# Altium PCB MB784.PCBDOC (part 1 of 4)
Units mil, origin at the board's own origin, x right, y up, seen from the top; angles counter-clockwise.
Board outline 4505 x 6805 mil, 4 copper layers (TopLayer, GND, S1, BottomLayer); 363 components, 323 nets, 1564 pads, 534 vias.
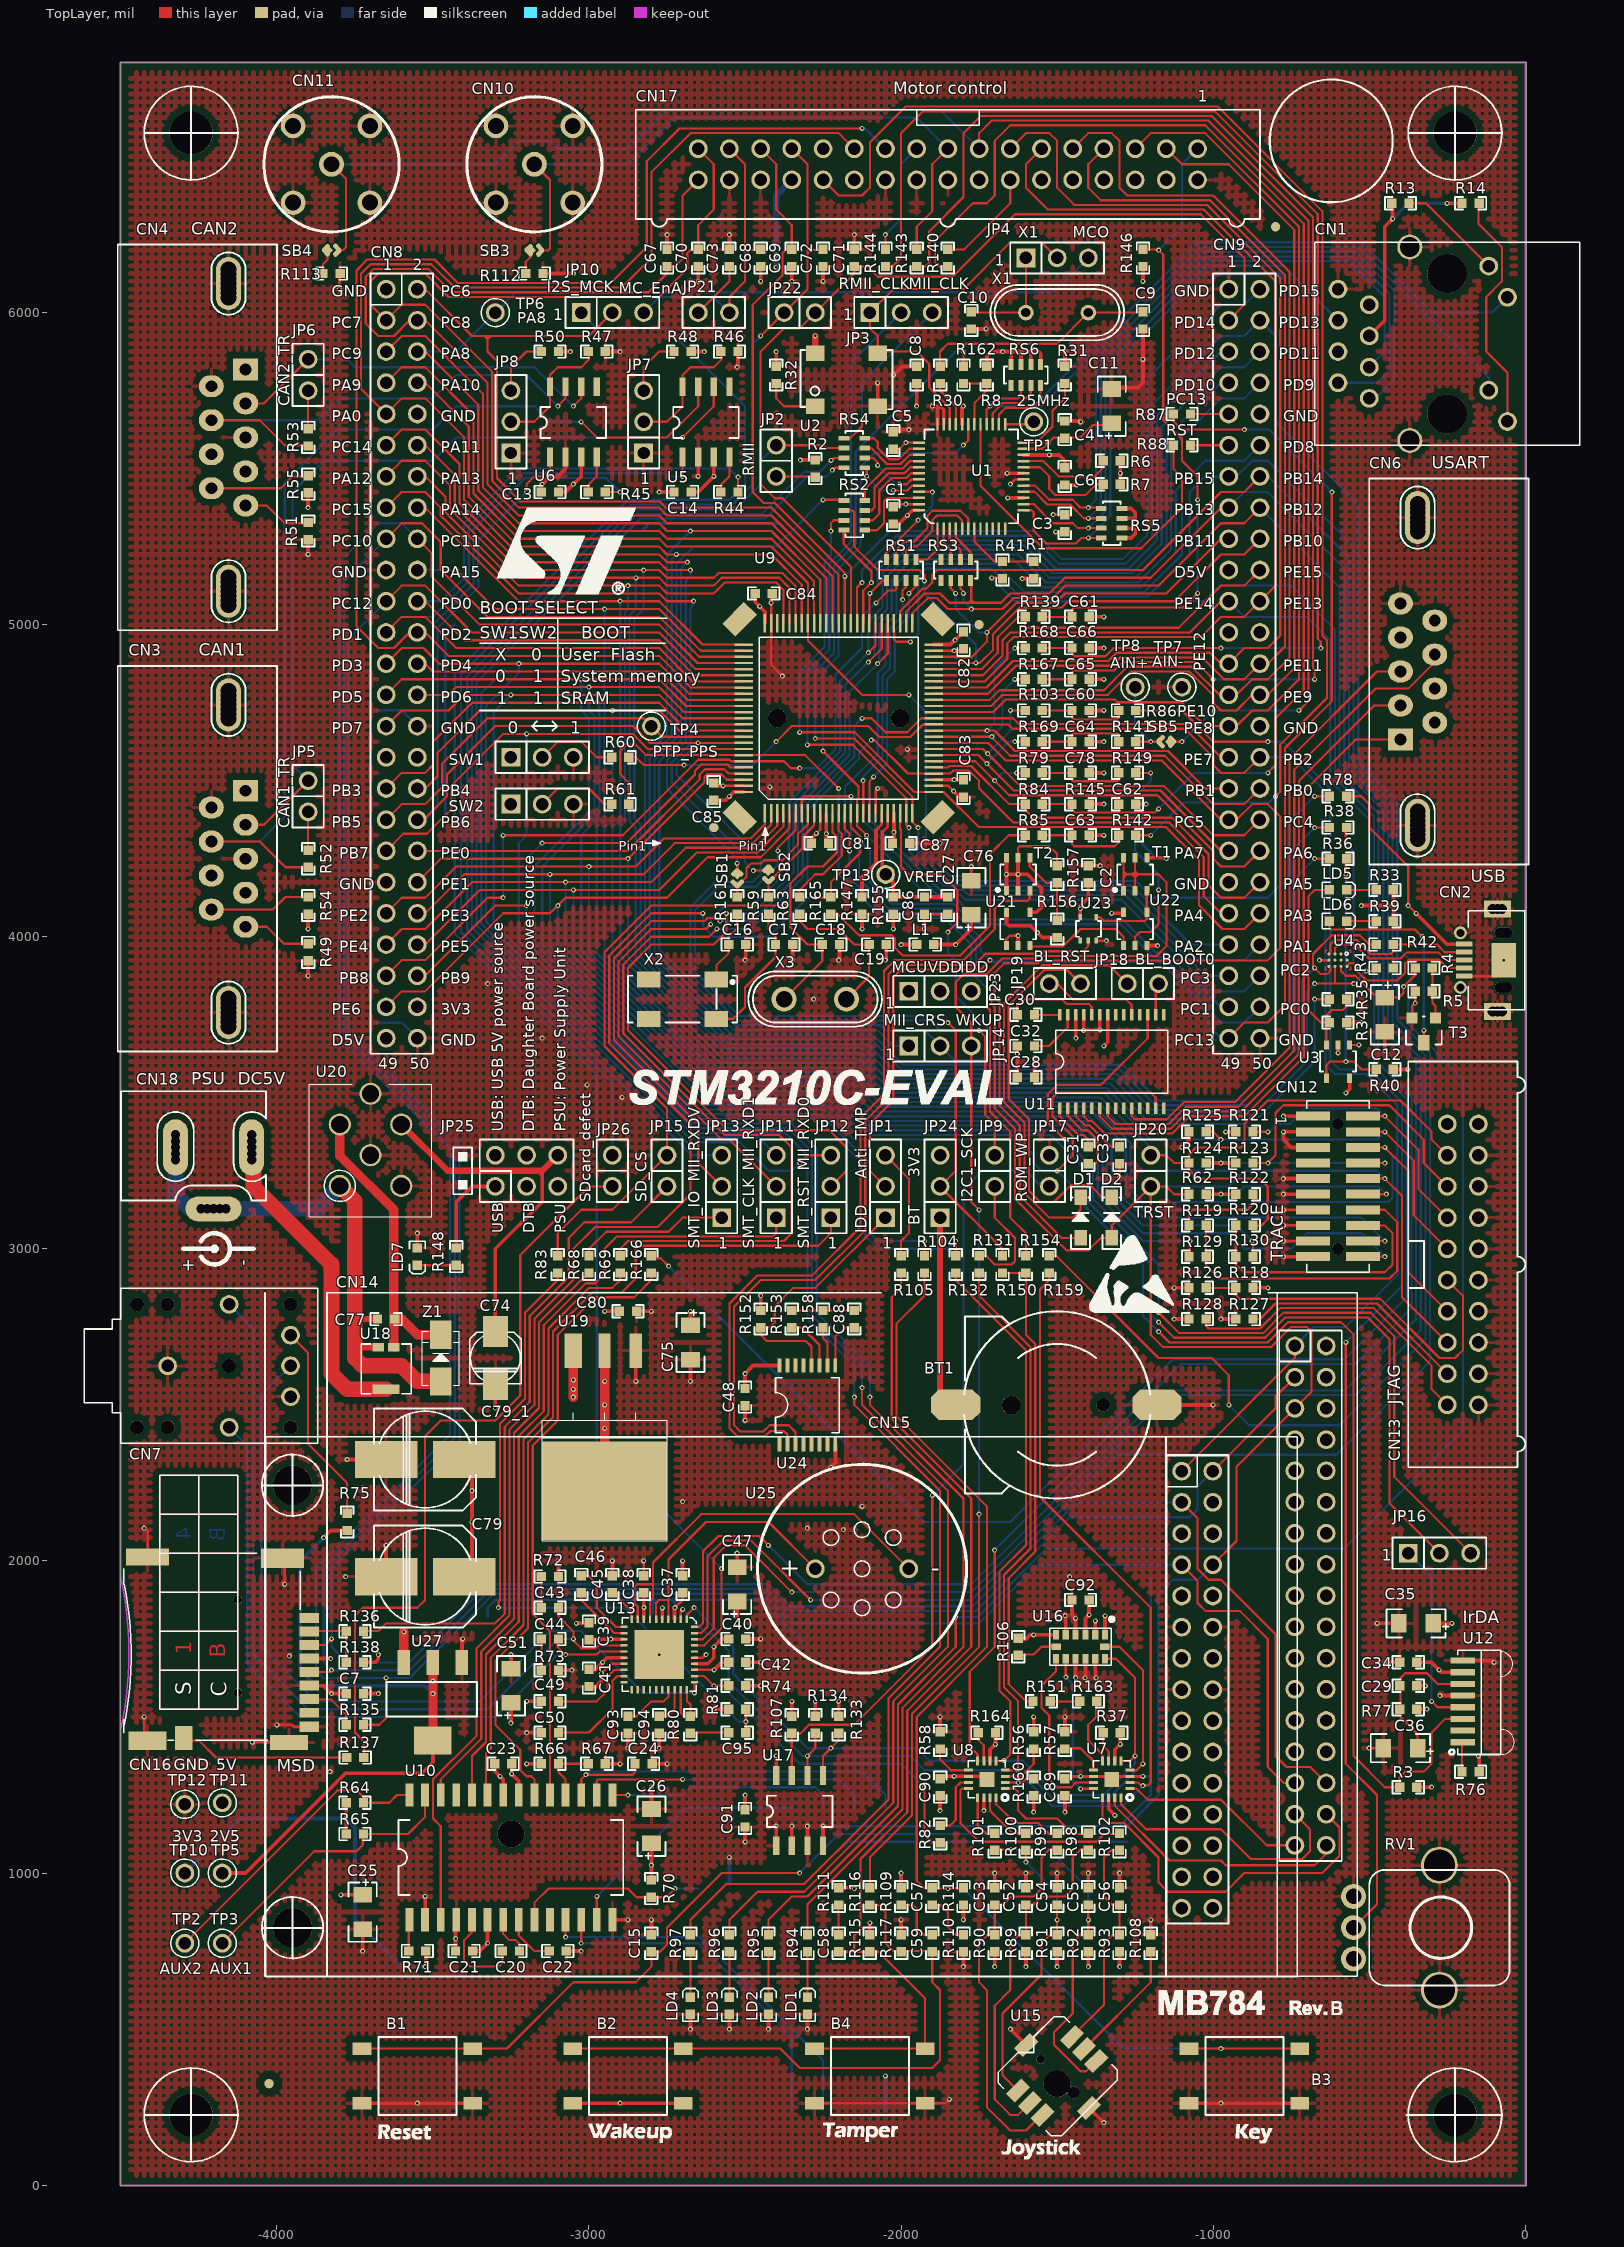
[diagram p0: TopLayer view]
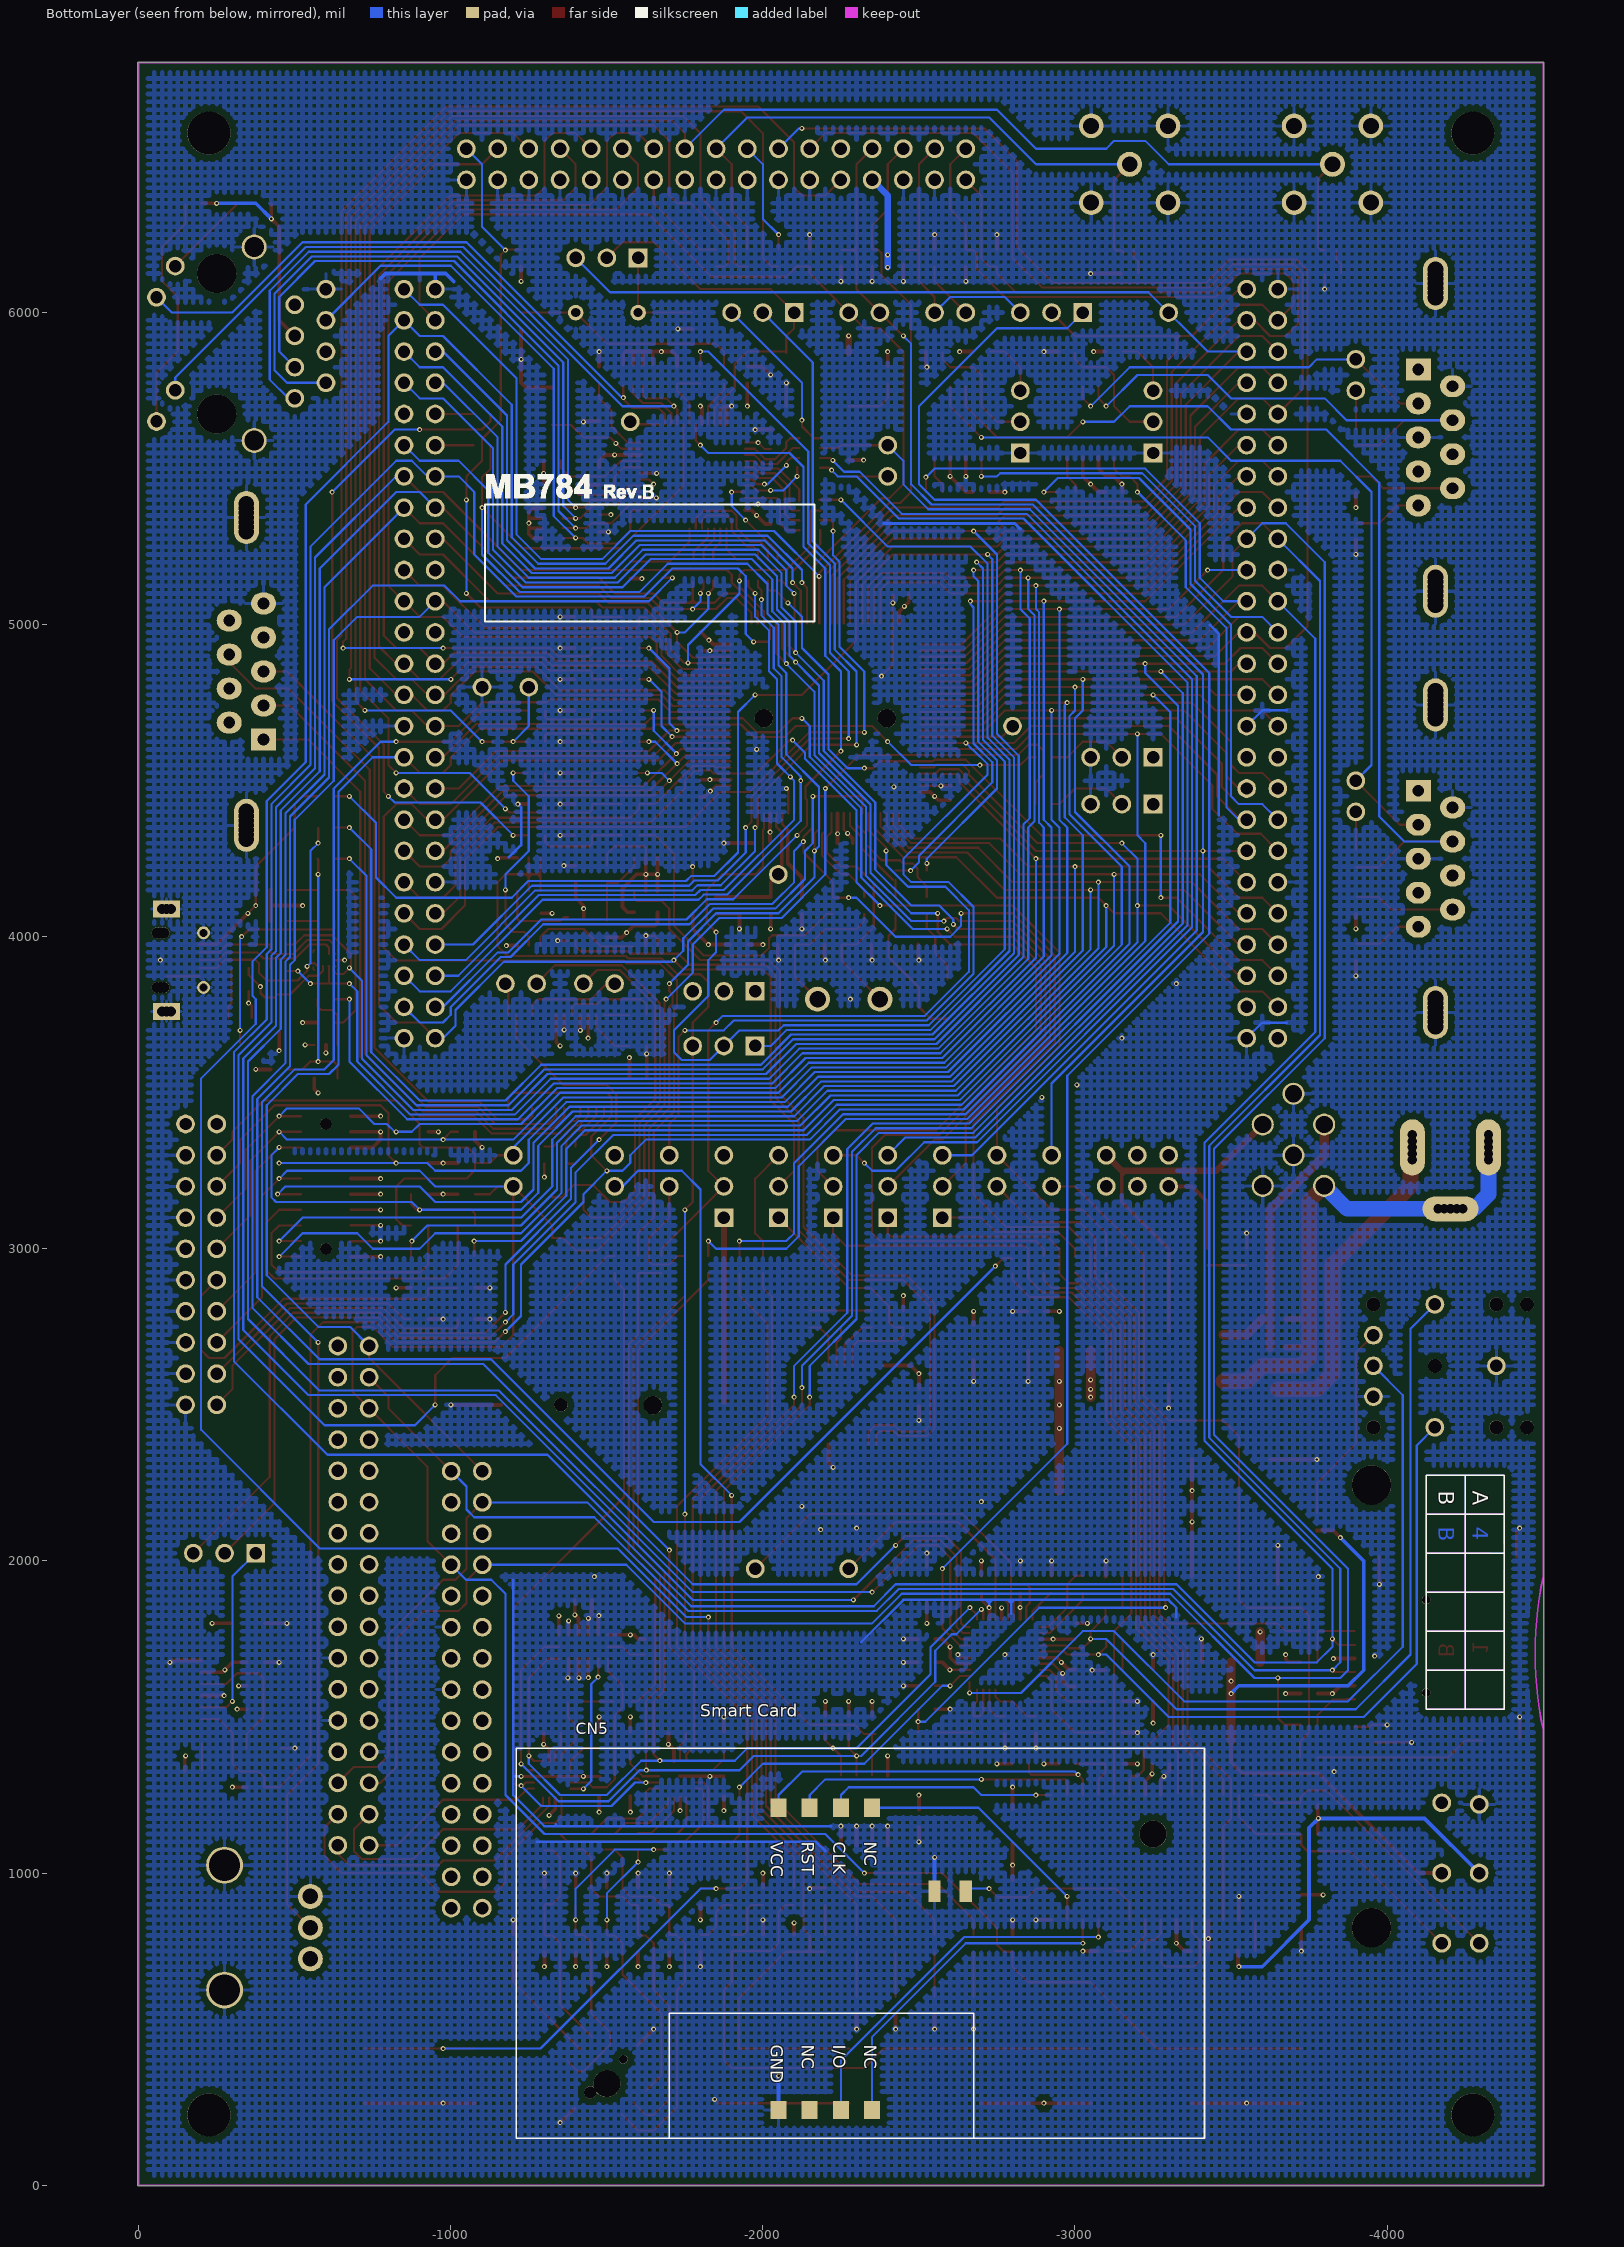
[diagram p1: BottomLayer view, seen from below]
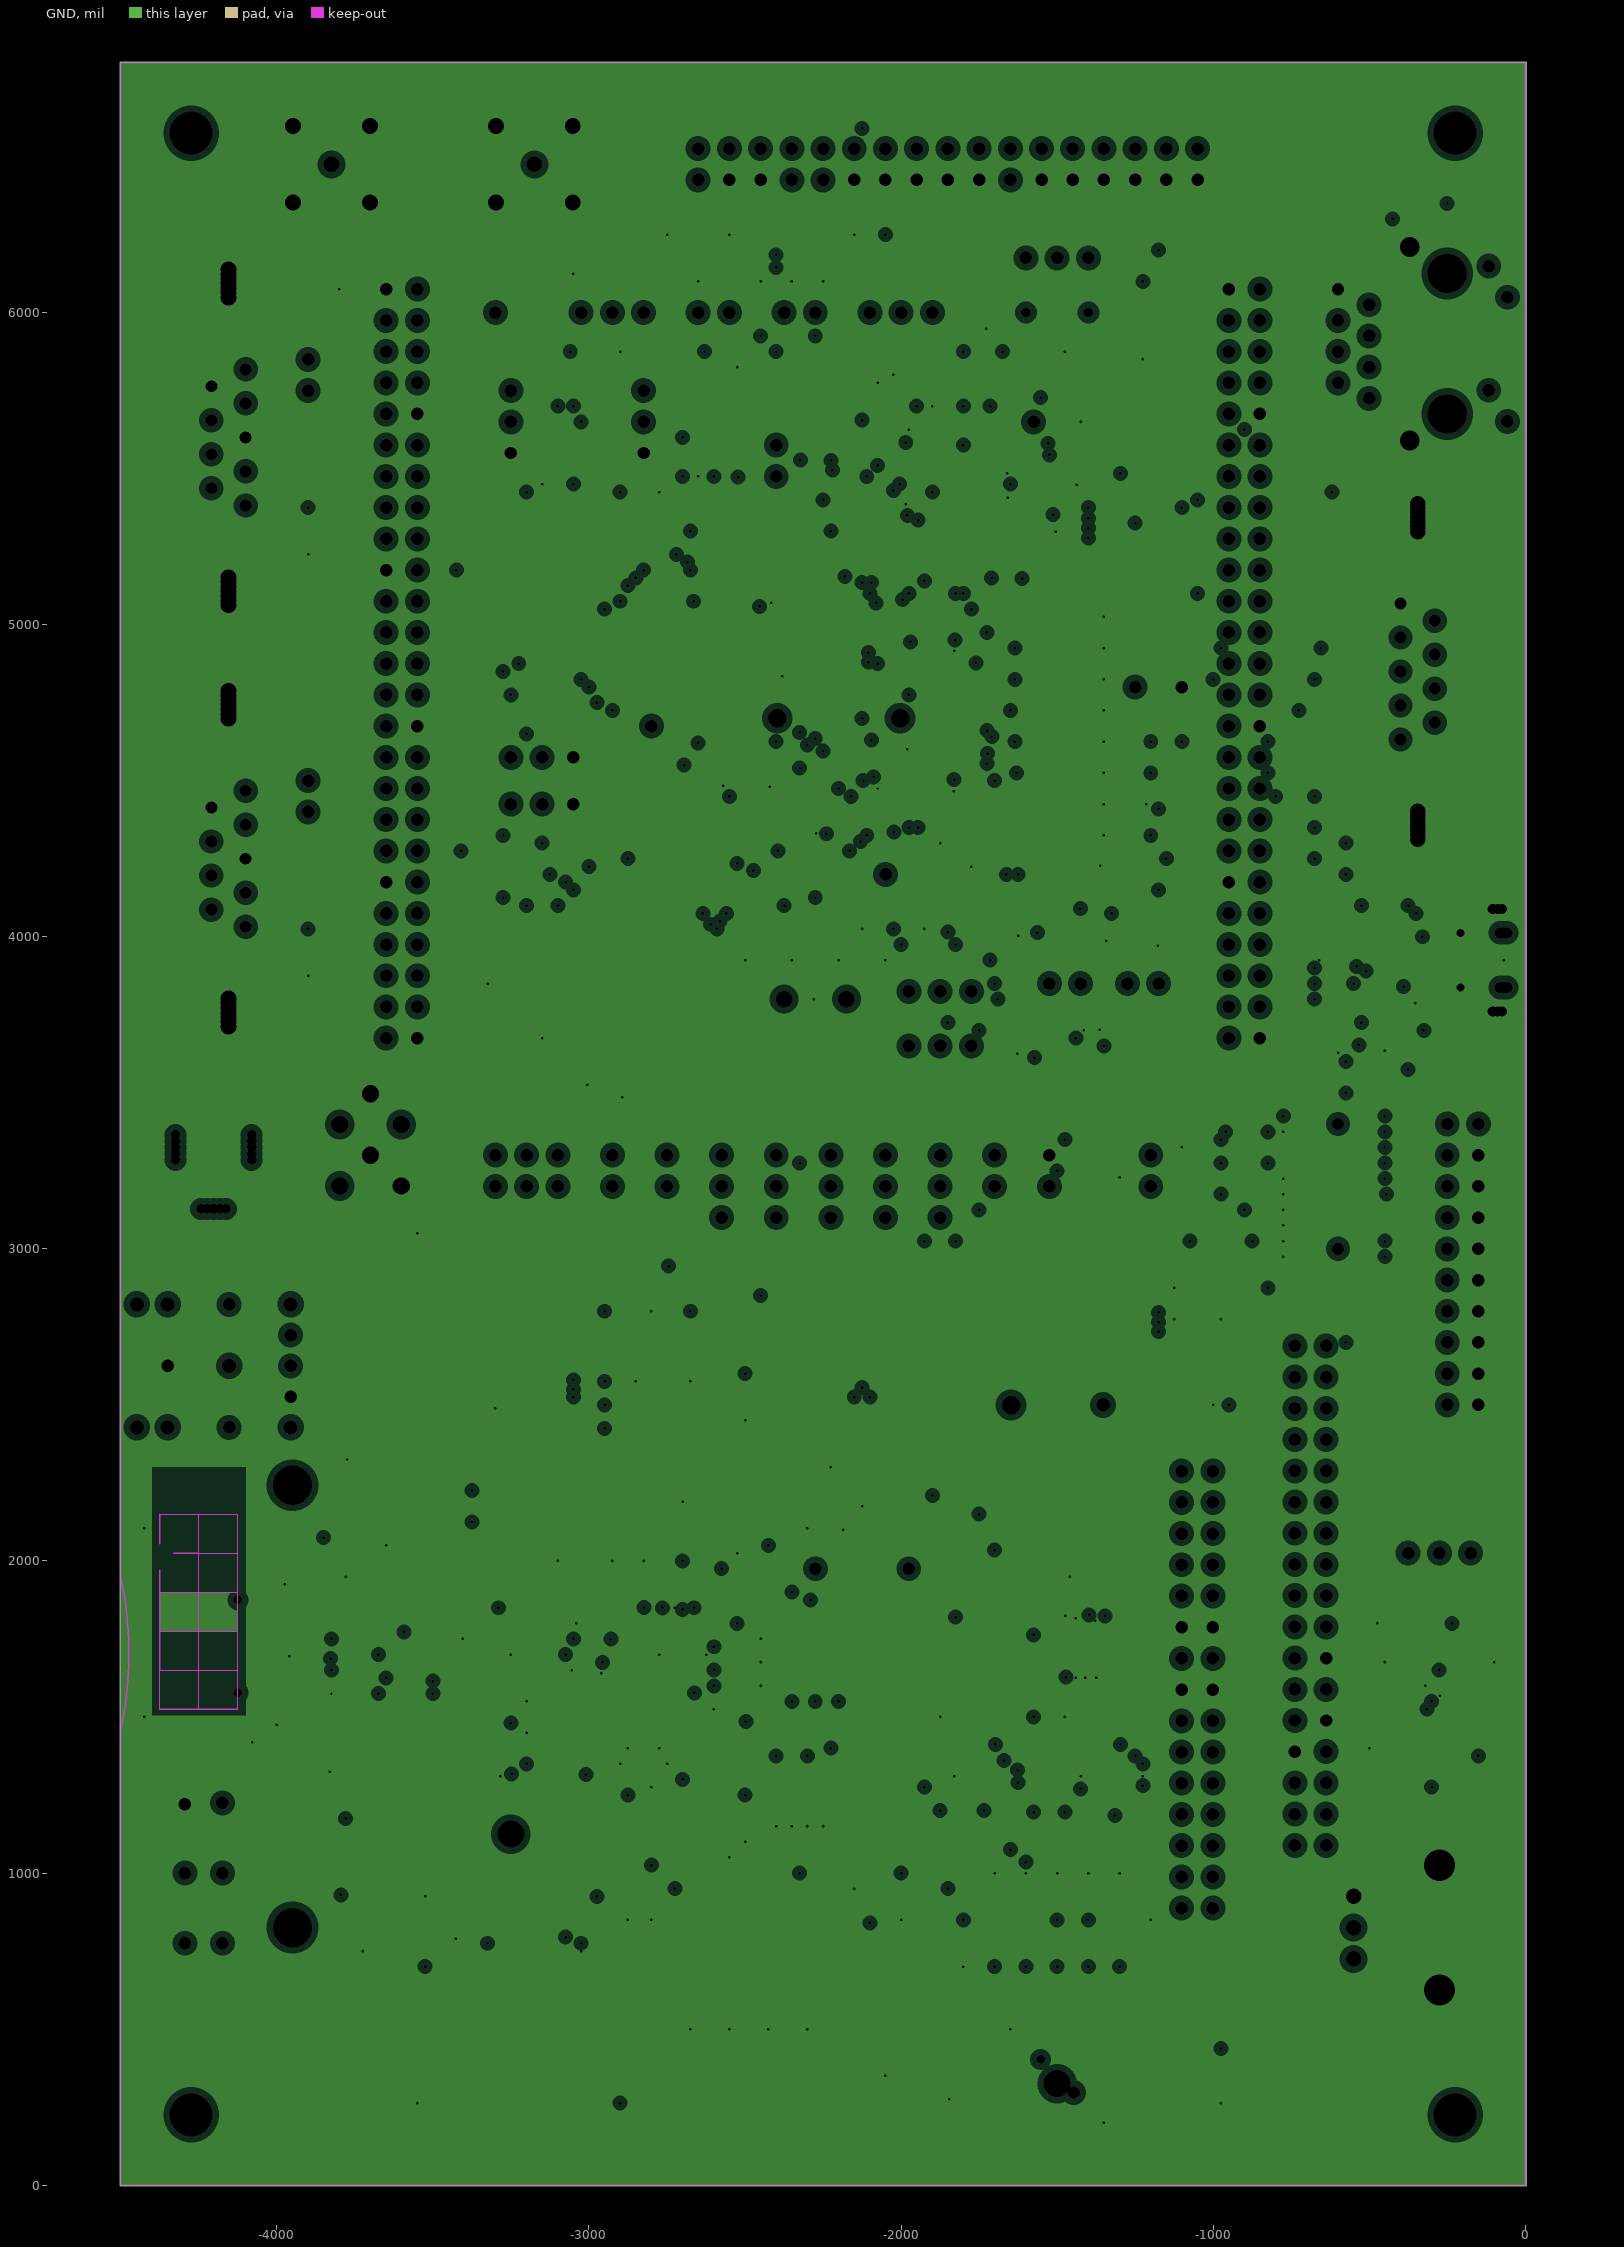
[diagram p2: GND, clearances drawn from the general rule]
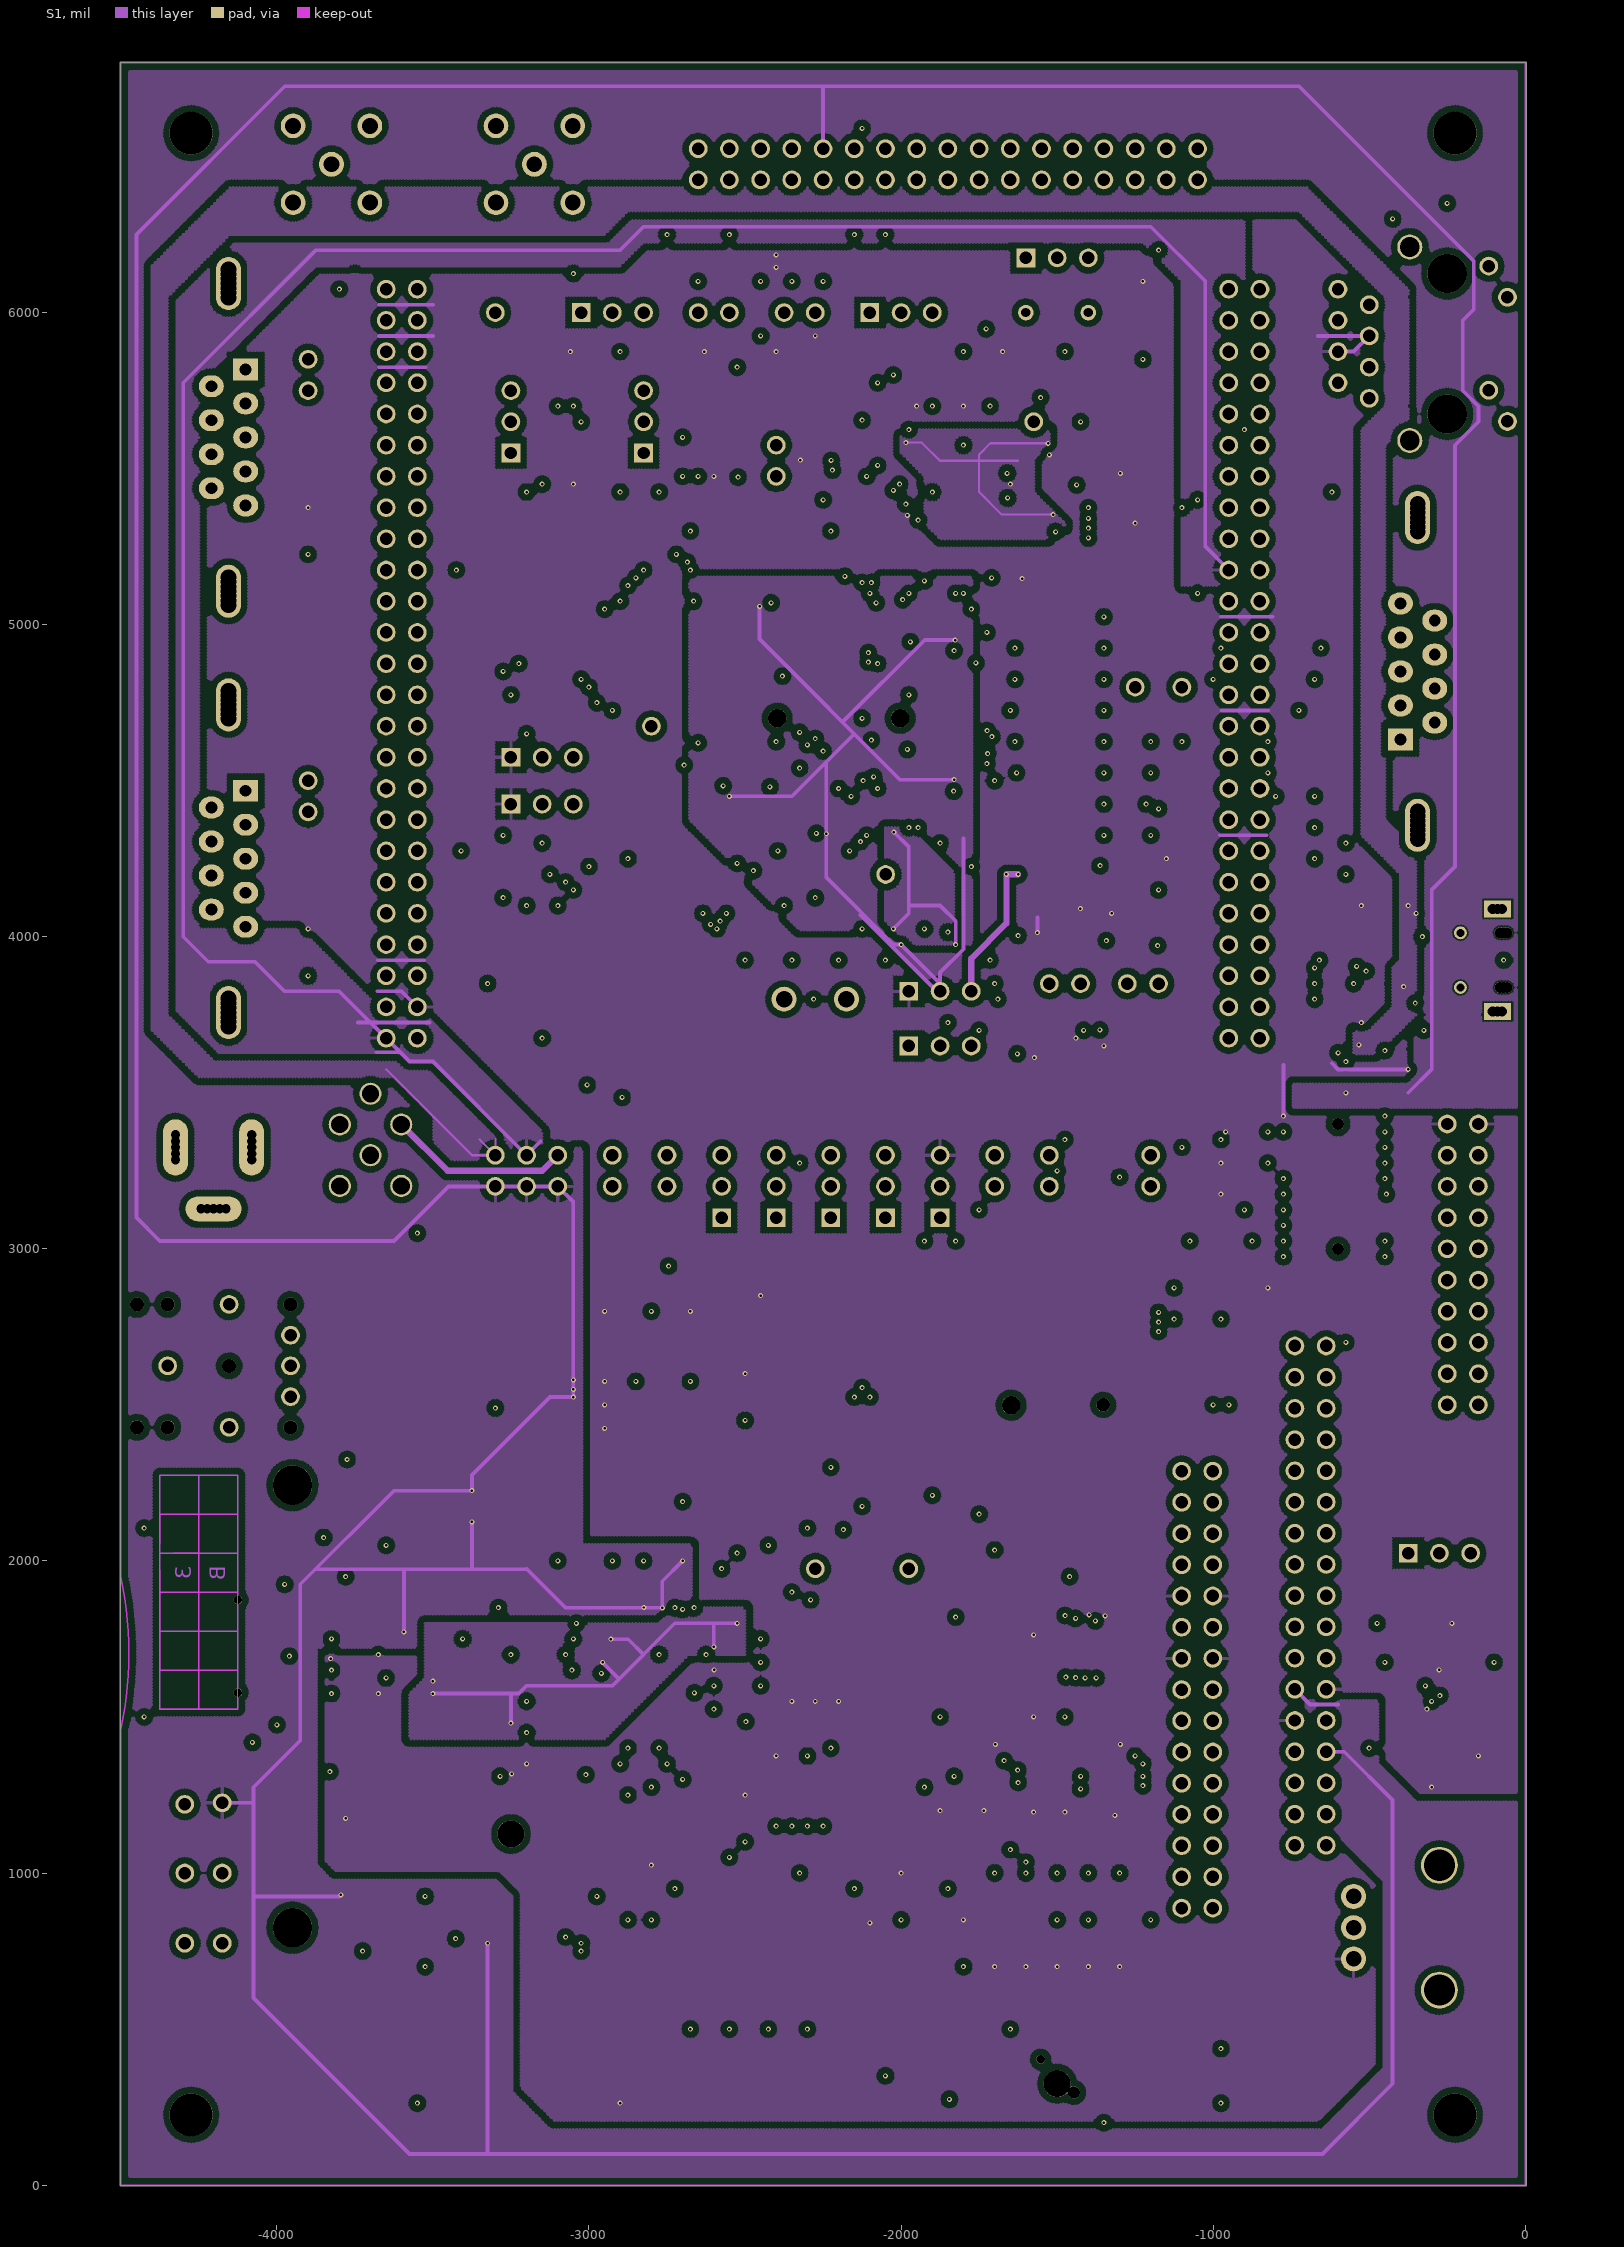
[diagram p3: S1]

## Layer stack, top to bottom
TopLayer: signal copper 1.4
Dielectric: core 12.6, FR-4, Dk 4.8
GND: plane copper 1.4, net GND
Dielectric: prepreg 12.6, FR-4, Dk 4.8
S1: signal copper 1.4
Dielectric: core 12.6, FR-4, Dk 4.8
BottomLayer: signal copper 1.4

## Board outline
-4502.5,-2.5 2.5,-2.5 2.5,6802.5 -4502.5,6802.5

## Design rules (kind name [scope] priority, off if disabled: settings)
Clearance Clearance_4 [InComponent('CN2')] p1: gap=5
Clearance Clearance_2 [InComponent('U4')] p2: gap=4
Clearance Clearance_3 [HasFootprint('JP2_SMD')] p3: gap=5
Clearance Clearance_1 [(InPoly)] p4: gap=20
Clearance [All] p5: gap=8
ComponentClearance [All] p1 off: gap=10 collisioncheckmode=0
PlaneClearance [All] p1: clearance=20
PlaneConnect [All] p1: planeconnectstyle=Relief reliefexpansion=20 reliefentries=4 reliefconductorwidth=10 reliefairgap=10
PolygonConnect [All] p1: connectstyle=Relief reliefconductorwidth=10 reliefentries=4 polygonreliefangle="90 Angle"
RoutingLayers [All] p1: top layer=Horizontal mid layer 1="Not Used" bottom layer=Vertical
RoutingVias [All] p1: holewidth=8 width=16 viastyle="Through Hole" minholewidth=8 minwidth=16 maxholewidth=28 maxwidth=50
SolderMaskExpansion [All] p1: expansion=4
TestPointUsage [All] p1: valid=0 allowmultiple=FALSE
Testpoint [All] p1: side=15 testpointundercomponent=TRUE minsize=40 maxsize=100 preferedsize=60 minholesize=20 maxholesize=40 preferedholesize=32 testpointgrid=1 style=1023 order=1234567890
Width Width_9 [InNet('VDDA')] p1: maxlimit=300 minlimit=8 preferedwidth=12
Width Width_10 [InNet('VREF+')] p2: maxlimit=300 minlimit=8 preferedwidth=12
Width Width_7 [InNet('GND')] p3: maxlimit=300 minlimit=8 preferedwidth=8
Width Width_6 [InNet('E5V')] p4: maxlimit=300 minlimit=8 preferedwidth=12
Width Width_1 [InNet('+2V5')] p5: maxlimit=300 minlimit=8 preferedwidth=12
Width Width_2 [InNet('+3V3')] p6: maxlimit=300 minlimit=8 preferedwidth=12
Width Width_3 [InNet('+5V')] p7: maxlimit=300 minlimit=8 preferedwidth=12
Width Width_11 [InNet('VREF-')] p8: maxlimit=300 minlimit=8 preferedwidth=12
Width Width_8 [InNet('VDD_MCU')] p9: maxlimit=300 minlimit=5 preferedwidth=12
Width Width_4 [InNet('D5V')] p10: maxlimit=300 minlimit=5 preferedwidth=12
Width Width_5 [InNet('DVDD')] p11: maxlimit=300 minlimit=5 preferedwidth=12
Width [All] p12: maxlimit=300 minlimit=5 preferedwidth=7
14 further rules are at their usual default settings.

## Classes and differential pairs
component class MCU: B1 C15 C16 C17 C18 C19 D1 D2 JP1 JP9 JP10 JP11 JP12 JP13 JP14 JP15 R59 R60 R61 R62 R63 R78 R161 R165 SW1 SW2 TP4 X2 X3
component class IOPeripherals: B2 B3 B4 C52 C53 C54 C55 C56 C57 C58 C59 C60 C91 C92 CN10 CN11 JP17 LD1 LD2 LD3 LD4 R89 R90 R91 R92 R93 R94 R95 R96 R97 R98 R99 R100 R101 R102 R103 R104 R105 R106 R107 R108 R109 R110 R111 R112 R113 R114 R115 R116 R117 RV1 SB3 SB4 U15 U16 U17
component class Power: BT1 C51 C74 C75 C76 C77 C78 C79 C80 C81 C82 C83 C84 C85 C86 C87 C88 CN18 JP23 JP24 JP25 L1 LD7 R79 R147 R148 R149 R150 R151 R152 R153 R154 R155 R156 R157 R158 R163 T1 T2 TP5 TP10 TP11 TP12 TP13 U9 U18 U19 U20 U21 U22 U23 U24 U27 Z1
component class Ethernet: C1 C2 C3 C4 C5 C6 C7 C8 C9 C10 C11 CN1 JP2 JP3 JP4 R1 R2 R3 R4 R5 R6 R7 R8 R9 R10 R11 R12 R13 R14 R15 R16 R17 R18 R19 R20 R21 R22 R23 R24 R25 R26 R27 R28 R29 R30 R31 R32 R41 R162 TP1 U1 U2 X1
component class USB_OTG_FS: C12 CN2 LD5 LD6 R33 R34 R35 R36 R38 R39 R40 R42 R43 U3 U4
component class CAN: C13 C14 CN3 CN4 JP5 JP6 JP7 JP8 R44 R45 R46 R47 R48 R49 R50 R51 R52 R53 R54 R55 U5 U6
component class SmartCard: C20 C21 C22 C23 C24 C25 C26 C27 CN5 R64 R65 R66 R67 R68 R69 R70 R71 R166 TP2 TP3 U10
component class USART&IrDA: C28 C29 C30 C31 C32 C33 C34 C35 C36 CN6 JP16 R76 R77 U11 U12
component class Audio: C37 C38 C39 C40 C41 C42 C43 C44 C45 C46 C47 C48 C49 C50 C93 C94 C95 CN7 R72 R73 R74 R75 R80 R81 R82 U13 U25
component class MotorControl: C61 C62 C63 C64 C65 C66 C67 C68 C69 C70 C71 C72 C73 CN17 JP21 JP22 R139 R140 R141 R142 R143 R144 R145 R146 R167 R168 R169
component class IO_Expandor: C89 C90 R37 R56 R57 R58 R159 R160 R164 U7 U8
component class ExtensionConnector: CN8 CN9 R87 R88 SB1 SB2
component class JTAG&Trace: CN12 CN13 JP20 R118 R119 R120 R121 R122 R123 R124 R125 R126 R127 R128 R129 R130
component class LCD: CN14 CN15
component class MicroSDCard: CN16 R135 R136 R137 R138
component class MB784: R131 R132 R133 R134
net class PA[0..15]: NetC62_2 PA0 PA1 PA2 PA3 PA4 PA6 PA7 PA8 PA9 PA10 PA11 PA12 PA13 PA14 PA15 PA[0..15]0 PA[0..15]1 PA[0..15]2 PA[0..15]3 PA[0..15]4 PA[0..15]5 PA[0..15]6 PA[0..15]7 PA[0..15]8 PA[0..15]9 PA[0..15]10 PA[0..15]11 PA[0..15]12 PA[0..15]13 PA[0..15]14 PA[0..15]15
net class PB[0..15]: PB0 PB1 PB2 PB3 PB4 PB5 PB6 PB7 PB8 PB9 PB10 PB11 PB12 PB13 PB14 PB15 PB[0..15]0 PB[0..15]1 PB[0..15]2 PB[0..15]3 PB[0..15]4 PB[0..15]5 PB[0..15]6 PB[0..15]7 PB[0..15]8 PB[0..15]9 PB[0..15]10 PB[0..15]11 PB[0..15]12 PB[0..15]13 PB[0..15]14 PB[0..15]15
net class PC[0..15]: PC0 PC1 PC2 PC3 PC4 PC5 PC6 PC7 PC8 PC9 PC10 PC11 PC12 PC13 PC14 PC15 PC[0..15]0 PC[0..15]1 PC[0..15]2 PC[0..15]3 PC[0..15]4 PC[0..15]5 PC[0..15]6 PC[0..15]7 PC[0..15]8 PC[0..15]9 PC[0..15]10 PC[0..15]11 PC[0..15]12 PC[0..15]13 PC[0..15]14 PC[0..15]15
net class PD[0..15]: NetJP10_3 PD0 PD1 PD3 PD4 PD5 PD6 PD7 PD8 PD9 PD10 PD11 PD12 PD13 PD15 PD[0..15]0 PD[0..15]1 PD[0..15]2 PD[0..15]3 PD[0..15]4 PD[0..15]5 PD[0..15]6 PD[0..15]7 PD[0..15]8 PD[0..15]9 PD[0..15]10 PD[0..15]11 PD[0..15]12 PD[0..15]13 PD[0..15]14 PD[0..15]15 PE0
net class PE[0..15]: PE0 PE1 PE2 PE3 PE4 PE5 PE6 PE7 PE8 PE9 PE10 PE11 PE12 PE13 PE14 PE15 PE[0..15]0 PE[0..15]1 PE[0..15]2 PE[0..15]3 PE[0..15]4 PE[0..15]5 PE[0..15]6 PE[0..15]7 PE[0..15]8 PE[0..15]9 PE[0..15]10 PE[0..15]11 PE[0..15]12 PE[0..15]13 PE[0..15]14 PE[0..15]15

## Components (designator, comment, footprint, x,y, rotation, side; value= is the part's Value field where it differs from the comment)
B1 "RESET" PB10 -3550,350 r0 top
B2 "WKUP" PB10 -2875,350 r0 top
B3 "USER" PB10 -900,350 r0 top
B4 "Tamper" PB10 -2100,350 r0 top
BT1 "CR1220 holder" LI1220_1 -1500,2500 r180 top
C1 "100nF" 0603C -2025,5350 r90 top
C2 "100nF" 0603C -1400,4200 r90 top
C3 "100nF" 0603C -1475,5325 r90 top
C4 "100nF" 0603C -1475,5625 r90 top
C5 "100nF" 0603C -2025,5590 r90 top
C6 "100nF" 0603C -1475,5475 r90 top
C7 "100nF" 0603C -3750,1575 r180 top
C8 "100nF" 0603C -1950,5800 r90 top
C9 "22pF" 0603R -1225,5975 r270 top
C10 "22pF" 0603R -1775,5975 r90 top
C11 "10uF" TAN-A -1325,5700 r270 top
C12 "4.7uF" TAN-A -450,3750 r90 top
C13 "100nF" 0603C -3125,5425 r180 top
C14 "100nF" 0603C -2700,5425 r180 top
C15 "100nF" 0603C -2800,775 r90 top
C16 "10pF" 0603C -2525,3975 r180 top
C17 "10pF" 0603C -2375,3975 r180 top
C18 "20pF" 0603C -2225,3975 r180 top
C19 "20pF" 0603C -2075,3975 r180 top
C20 "100nF" 0603C -3250,750 r0 top
C21 "100nF" 0603C -3400,750 r0 top
C22 "100nF" 0603C -3100,750 r180 top
C23 "100nF" 0603C -3275,1350 r0 top
C24 "100nF" 0603C -2825,1350 r0 top
C25 "10uF" TAN-A -3725,875 r90 top
C26 "10uF" TAN-A -2800,1150 r270 top
C27 "470nF" 0603C -1850,4100 r90 top
C28 "100nF" 0603C -1600,3550 r0 top
C29 "100nF" 0603C -375,1600 r180 top
C30 "100nF" 0603C -1600,3750 r180 top
C31 "100nF" 0603C -1400,3300 r90 top
C32 "100nF" 0603C -1600,3650 r0 top
C33 "100nF" 0603C -1300,3300 r90 top
C34 "100nF" 0603C -375,1675 r180 top
C35 "4.7uF" TAN-A -350,1800 r0 top
C36 "4.7uF" TAN-A -400,1400 r0 top
C37 "100nF" 0603C -2700,1925 r90 top
C38 "100nF" 0603C -2825,1925 r270 top
C39 "100nF" 0603C -3000,1775 r90 top
C40 "100nF" 0603C -2525,1750 r0 top
C41 "100nF" 0603C -3000,1625 r270 top
C42 "100nF" 0603C -2525,1675 r0 top
C43 "0.022uF" 0603C -3125,1850 r180 top
C44 "0.022uF" 0603C -3125,1750 r180 top
C45 "1uF" 0603C -2925,1925 r270 top
C46 "1uF" 0603C -3025,1925 r270 top
C47 "1uF" TAN-A -2525,1925 r270 top
C48 "100nF" 0603C -2500,2525 r90 top
C49 "1uF" 0603C -3125,1550 r180 top
C50 "1uF" 0603C -3125,1450 r180 top
C51 "10uF" TAN-A -3250,1600 r270 top
C52 "100nF" 0603C -1600,925 r90 top
C53 "100nF" 0603C -1700,925 r90 top
C54 "100nF" 0603C -1500,925 r90 top
C55 "100nF" 0603C -1400,925 r90 top
C56 "100nF" 0603C -1300,925 r90 top
C57 "100nF" 0603C -1900,925 r270 top
C58 "100nF" 0603C -2200,775 r90 top
C59 "[N/A]" 0603C -1900,775 r90 top
C60 "10nF" 0603C -1425,4725 r0 top
C61 "1nF" 0603C -1425,5025 r0 top
C62 "100nF" 0603C -1275,4425 r0 top
C63 "100nF" 0603C -1425,4325 r0 top
C64 "[N/A]" 0603C -1425,4625 r0 top
C65 "[N/A]" 0603C -1425,4825 r0 top
C66 "[N/A]" 0603C -1425,4925 r0 top
C67 "[N/A]" 0603C -2750,6175 r90 top
C68 "[N/A]" 0603C -2450,6175 r270 top
C69 "[N/A]" 0603C -2350,6175 r270 top
C70 "[N/A]" 0603C -2650,6175 r270 top
C71 "[N/A]" 0603C -2150,6175 r90 top
C72 "[N/A]" 0603C -2250,6175 r270 top
C73 "10nF" 0603C -2550,6175 r90 top
C74 "10uF" C160M -3300,2650 r90 top
C75 "10uF" TAN-A -2675,2700 r90 top
C76 "10uF" TAN-A -1775,4125 r270 top
C77 "100nF" 0603C -3650,2775 r0 top
C78 "0.47uF" 0603C -1425,4525 r180 top
C79 "220uF" C310M -3525,1950 r0 top
C79_1 "220uF" C310M -3525,2325 r0 top
C80 "100nF" 0603C -2875,2800 r180 top
C81 "10nF" 0603C -2260,4300 r0 top
C82 "10nF" 0603C -1800,4950 r90 top
C83 "10nF" 0603C -1800,4475 r90 top
C84 "10nF" 0603C -2440,5100 r180 top
C85 "10nF" 0603C -2600,4465 r270 top
C86 "10nF" 0603C -1925,4100 r90 top
C87 "10nF" 0603C -2000,4300 r180 top
C88 "1nF" 0603C -2150,2775 r270 top
C89 "100nF" 0603C -1475,1275 r270 top
C90 "100nF" 0603C -1875,1275 r90 top
C91 "100nF" 0603C -2500,1175 r270 top
C92 "100nF" 0603C -1425,1875 r180 top
C93 "150pF(COG)" 0603C -2875,1475 r270 top
C94 "150pF(COG)" 0603C -2775,1475 r270 top
C95 "1uF" 0603C -2525,1450 r180 top
CN1 "J0011D21B" J0011D21B -250,5675 r270 top
CN2 "475900001" USB-MICRO-AB -195,3925 r180 top
CN3 "DB9-male CAN connector" DB9/M -4100,4250 r90 top
CN4 "DB9-male CAN connector" DB9/M -4100,5600 r90 top
CN5 "C816" SAM(C816) -2375,725 r270 bottom
CN6 "DB9-male UART4" DB9/M -400,4850 r270 top
CN7 "ST-212-02V" ST-212-02V -4350,2625 r180 top
CN8 "Header 25X2" 2*25P -3650,6075 r0 top locked
CN9 "Header 25X2" 2*25P -950,6075 r0 top locked
CN10 "VB334" VB334 -3175,6475 r0 top
CN11 "VB334" VB334 -3825,6475 r0 top
CN12 "FTSH-110-01-L-DV" FTSH-110-01-L-DV -600,3200 r270 top
CN13 "JTAG" IDC20S -250,3400 r0 top locked
CN14 "3.2\" LCD_connector (MB785 with AM-240320D4TOQW-T00H(R))" AM240*320AA -3950,825 r0 top
CN15 "2.4\" LCD connector (MB542 with AM240320L8TNQW-00H)" AM240*320B -3950,825 r0 top
CN16 "PJS008-2000" MSD(PJS008) -4125,1875 r180 top
CN17 "MC_connector" IDC34S -1050,6525 r270 top locked
CN18 "DC-10B" DC10B -4325,3325 r0 top
D1 "1N4148" 1504D -1425,3100 r270 top
D2 "1N4148" 1504D -1325,3100 r270 top
JP1 "" SIP3 -2050,3100 r90 top
JP2 "" SIP2 -2400,5575 r270 top
JP3 "" SIP3 -2100,6000 r0 top
JP4 "" SIP3 -1600,6175 r0 top
JP5 "" SIP2 -3900,4400 r90 top
JP6 "" SIP2 -3900,5750 r90 top
JP7 "" SIP3 -2825,5550 r90 top
JP8 "" SIP3 -3250,5550 r90 top
JP9 "" SIP2 -1700,3300 r270 top
JP10 "" SIP3 -3025,6000 r0 top
JP11 "" SIP3 -2400,3100 r90 top
JP12 "" SIP3 -2225,3100 r90 top
JP13 "" SIP3 -2575,3100 r90 top
JP14 "" SIP3 -1975,3650 r0 top
JP15 "" SIP2 -2750,3300 r270 top
JP16 "" SIP3 -375,2025 r0 top
JP17 "" SIP2 -1525,3200 r90 top
JP18 "" SIP2 -1275,3850 r0 top
JP19 "" SIP2 -1425,3850 r180 top
JP20 "" SIP2 -1200,3300 r270 top
JP21 "" SIP2 -2550,6000 r180 top
JP22 "" SIP2 -2375,6000 r0 top
JP23 "" SIP3 -1975,3825 r0 top
JP24 "" SIP3 -1875,3100 r90 top
JP25 "" 2*3P -3300,3200 r90 top
JP26 "" SIP2 -2925,3200 r90 top
L1 "BEAD" 0603L -1950,3975 r180 top
LD1 "Green" 0603D -2300,575 r90 top
LD2 "Orange" 0603D -2425,575 r90 top
LD3 "Red" 0603D -2550,575 r90 top
LD4 "Blue" 0603D -2675,575 r90 top
LD5 "Red" 0603D -600,4150 r0 top
LD6 "Green" 0603D -600,4050 r0 top
LD7 "red" 0603D -3550,2975 r270 top
R1 "2K2" 0603R -1575,5175 r270 top
R2 "2K2" 0603R -2275,5500 r270 top
R3 "10K" 0603R -375,1275 r0 top
R4 "47K" 0603R -325,3900 r0 top
R5 "[N/A]" 0603R -325,3825 r180 top
R6 "2K2" 0603R -1325,5525 r180 top
R7 "2K2" 0603R -1325,5450 r180 top
R8 "1K5" 0603R -1725,5800 r270 top
R13 "240" 0603R -400,6350 r0 top
R14 "240" 0603R -175,6350 r0 top
R30 "0" 0603R -1875,5800 r270 top
R31 "4.87K" 0603R -1475,5800 r90 top
R32 "10K" 0603R -2400,5800 r90 top
R33 "680" 0603R -450,4150 r180 top
R34 "47K" 0603R -600,3725 r0 top
R35 "0" 0603R -600,3800 r180 top
R36 "0" 0603R -600,4250 r0 top
R37 "10K" 0603R -1325,1450 r180 top
R38 "0" 0603R -600,4350 r0 top
R39 "330" 0603R -450,4050 r180 top
R40 "10K" 0603R -450,3575 r0 top
R41 "0" 0603R -1675,5175 r270 top
R42 "22[N/A]" 0603R -450,3975 r0 top
R43 "22[N/A]" 0603R -450,3900 r0 top
R44 "0" 0603R -2550,5425 r180 top
R45 "0" 0603R -2975,5425 r180 top
R46 "10K" 0603R -2550,5875 r180 top
R47 "10K" 0603R -2975,5875 r180 top
R48 "0" 0603R -2700,5875 r180 top
R49 "0" 0603R -3900,3950 r270 top
R50 "0" 0603R -3125,5875 r180 top
R51 "0" 0603R -3900,5300 r270 top
R52 "120" 0603R -3900,4250 r270 top
R53 "120" 0603R -3900,5600 r270 top
R54 "[N/A]" 0603R -3900,4100 r270 top
R55 "[N/A]" 0603R -3900,5450 r270 top
R56 "10K" 0603R -1575,1425 r270 top
R57 "100K" 0603R -1475,1425 r270 top
R58 "100K" 0603R -1875,1425 r270 top
R59 "0" 0603R -2425,4100 r270 top
R60 "10K" 0603R -2900,4575 r0 top
R61 "10K" 0603R -2900,4425 r0 top
R62 "[N/A]" 0603R -1050,3175 r180 top
R63 "390" 0603R -2325,4100 r90 top
R64 "10K" 0603R -3750,1225 r180 top
R65 "10K" 0603R -3750,1125 r180 top
R66 "10K" 0603R -3125,1350 r180 top
R67 "10K" 0603R -2975,1350 r180 top
R68 "0" 0603R -3000,2950 r270 top
R69 "0" 0603R -2900,2950 r90 top
R70 "100K" 0603R -2800,950 r90 top
R71 "4K7" 0603R -3550,750 r0 top
R72 "51" 0603R -3125,1950 r0 top
R73 "51" 0603R -3125,1650 r0 top
R74 "10K" 0603R -2525,1600 r180 top
R75 "47K" 0603R -3775,2125 r270 top
R76 "5" 0603R -175,1325 r0 top
R77 "47" 0603R -375,1525 r0 top
R78 "0" 0603R -600,4450 r0 top
R79 "0" 0603R -1575,4525 r0 top
R80 "100" 0603R -2675,1475 r270 top
R81 "100K" 0603R -2525,1525 r0 top
R82 "0" 0603R -1875,1125 r270 top
R83 "0" 0603R -3100,2950 r270 top
R84 "0" 0603R -1575,4425 r0 top
R85 "0" 0603R -1575,4325 r0 top
R86 "1K" 0603R -1275,4725 r180 top
R87 "820" 0603R -1100,5675 r180 top
R88 "820" 0603R -1100,5575 r0 top
R89 "10K" 0603R -1600,775 r270 top
R90 "10K" 0603R -1700,775 r90 top
R91 "10K" 0603R -1500,775 r90 top
R92 "10K" 0603R -1400,775 r90 top
R93 "10K" 0603R -1300,775 r90 top
R94 "330" 0603R -2300,775 r270 top
R95 "680" 0603R -2425,775 r270 top
R96 "680" 0603R -2550,775 r270 top
R97 "680" 0603R -2675,775 r270 top
R98 "0" 0603R -1400,1100 r270 top
R99 "0" 0603R -1500,1100 r270 top
R100 "0" 0603R -1600,1100 r270 top
R101 "0" 0603R -1700,1100 r270 top
R102 "0" 0603R -1300,1100 r270 top
R103 "0" 0603R -1575,4725 r180 top
R104 "0" 0603R -1925,2950 r270 top
R105 "0" 0603R -2000,2950 r270 top
R106 "10K" 0603R -1625,1725 r90 top
R107 "10K" 0603R -2350,1475 r90 top
R108 "100" 0603R -1200,775 r90 top
R109 "100" 0603R -2000,925 r90 top
R110 "100" 0603R -1800,775 r270 top
R111 "100" 0603R -2200,925 r90 top
R112 "50" 0603R -3175,6125 r180 top
R113 "50" 0603R -3825,6125 r180 top
R114 "4K7" 0603R -1800,925 r90 top
R115 "4K7" 0603R -2100,775 r270 top
R116 "330" 0603R -2100,925 r270 top
R117 "220K" 0603R -2000,775 r270 top
R118 "[N/A]" 0603R -900,2875 r180 top
R119 "[N/A]" 0603R -1050,3075 r0 top
R120 "[N/A]" 0603R -900,3075 r180 top
R121 "10K" 0603R -900,3375 r0 top
R122 "10K" 0603R -900,3175 r0 top
R123 "10K" 0603R -900,3275 r0 top
R124 "10K" 0603R -1050,3275 r180 top
R125 "10K" 0603R -1050,3375 r180 top
R126 "10K" 0603R -1050,2875 r180 top
R127 "10K" 0603R -900,2775 r0 top
R128 "10K" 0603R -1050,2775 r0 top
R129 "0" 0603R -1050,2975 r0 top
R130 "0" 0603R -900,2975 r180 top
R131 "0" 0603R -1750,2950 r270 top
R132 "0" 0603R -1825,2950 r270 top
R133 "4K7" 0603R -2200,1475 r90 top
R134 "4K7" 0603R -2275,1475 r90 top
R135 "0" 0603R -3750,1475 r0 top
R136 "0" 0603R -3750,1775 r180 top
R137 "0" 0603R -3748.84,1370 r0 top
R138 "4K7" 0603R -3750,1675 r180 top
R139 "0" 0603R -1575,5025 r0 top
R140 "0" 0603R -1850,6175 r90 top
R141 "0" 0603R -1275,4625 r180 top
R142 "0" 0603R -1275,4325 r0 top
R143 "0" 0603R -1950,6175 r270 top
R144 "0" 0603R -2050,6175 r270 top
R145 "100K" 0603R -1425,4425 r0 top
R146 "3K3" 0603R -1225,6175 r90 top
R147 "0" 0603R -2125,4100 r270 top
R148 "1K5" 0603R -3425,2975 r270 top
R149 "4K7" 0603R -1275,4525 r0 top
R150 "10K(1%)" 0603R -1675,2950 r270 top
R151 "20K(1%)" 0603R -1550,1550 r0 top
R152 "10K" 0603R -2450,2775 r90 top
R153 "30K" 0603R -2350,2775 r270 top
R154 "0" 0603R -1600,2950 r90 top
R155 "47" 0603R -2025,4100 r90 top
R156 "1(1%)" 0603R -1500,4025 r90 top
R157 "1K(1%)" 0603R -1500,4200 r90 top
R158 "15K" 0603R -2250,2775 r270 top
R159 "0" 0603R -1525,2950 r90 top
R160 "10K" 0603R -1575,1275 r90 top
R161 "0" 0603R -2525,4100 r270 top
R162 "0" 0603R -1800,5800 r90 top
R163 "0" 0603R -1400,1550 r0 top
R164 "10K" 0603R -1725,1450 r180 top
R165 "0" 0603R -2225,4100 r90 top
R166 "0" 0603R -2800,2950 r90 top
R167 "0" 0603R -1575,4825 r180 top
R168 "0" 0603R -1575,4925 r180 top
R169 "0" 0603R -1575,4625 r180 top
RS1 "33" RES-4B -2000,5175 r180 top
RS2 "33" RES-4B -2150,5350 r90 top
RS3 "33" RES-4B -1825,5175 r180 top
RS4 "33" RES-4B -2150,5550 r90 top
RS5 "50" RES-4B -1325,5325 r90 top
RS6 "2K2" RES-4B -1600,5800 r180 top
RV1 "10K" ADJRH -550,825 r270 top
SB1 "" JP2_SMD -2525,4188.19 r90 top
SB2 "" JP2_SMD -2425,4200 r90 top
SB3 "" JP2_SMD -3175,6200 r180 top
SB4 "" JP2_SMD -3825,6200 r180 top
SB5 "" JP2_SMD -1150,4625 r0 top
SW1 "09.03290.01" SIP3 -3250,4575 r0 top
SW2 "09.03290.01" SIP3 -3250,4425 r0 top
T1 "STT5PF20V" SOT-23-6L -1250,4200 r90 top
T2 "STT5PF20V" SOT-23-6L -1625,4200 r90 top
T3 "9013" SOT-23 -325,3700 r90 top
TP1 "25MHz" TP -1575,5650 r0 top
TP2 "AUX2" TP -4295,775 r0 top
TP3 "AUX1" TP -4175,775 r0 top
TP4 "PTP_PPS" TP -2799.84,4674.84 r180 top
TP5 "2V5" TP -4175,1000 r0 top
TP6 "MCO" TP -3300,6000 r0 top
TP7 "AIN-" TP -1100,4800 r0 top
TP8 "AIN+" TP -1250,4800 r0 top
TP10 "3V3" TP -4295,1000 r90 top
TP11 "5V" TP -4175,1225 r270 top
TP12 "Ground" TP -4295.23,1220 r270 top
TP13 "VREF" TP -2049.5,4199.5 r180 top
U1 "DP83848CVV" LQFP48 -1775,5475 r0 top
U2 "SM7745HEV-50.0M (do not fit)" XTAL_5X7 -2275,5700 r90 top
U3 "STMPS2141STR" SOT-23-5L -600,3600 r270 top
U4 "EMIF02-USB03F2" FlipChip(11) -600,3925 r180 top
U5 "SN65HVD230" SO8 -2625,5650 r0 top
U6 "SN65HVD230" SO8 -3050,5650 r0 top
U7 "STMPE811" QFN16(3X3) -1325,1300 r90 top
U8 "STMPE811" QFN16(3X3) -1725,1300 r90 top
U9 "BARRACUDA_256K" TQ100_TOOL -2200,4700 r0 top
U10 "ST8024CDR" SO28 -3250,1050 r0 top
U11 "ST3241EBPR" SSOP28 -1325,3600 r90 top
U12 "TFDU4300" IR_VISHAY3 -200,1550 r90 top
U13 "CS43L22" QFN40(6*6) -2775,1700 r270 top
U15 "MT008-A" JOY -1500,350 r315 top
U16 "LIS302DL" LGA14(3*5) -1425,1725 r180 top
U17 "M24C64-WMN6" SO8 -2325,1200 r0 top
U18 "ZEN056V130A24LS" polyzen -3650,2550 r90 top
U19 "LD1086D2M33" D2PAK/A -2950,2225 r90 top
U20 "BNX002-01" BNX001 -3700,3300 r90 top
U21 "MAX9938FEUK+" SOT-23-5L -1625,4025 r90 top
U22 "74H1G66STR" SOT-23-5L -1250,4025 r90 top
U23 "74LX1G04CTR" SOT323-5L -1400,4025 r0 top
U24 "M74HC4060TTR" TSSOP16 -2300,2500 r0 top
U25 "KSS-1508 or KSSG1708" KS1708 -2125,1975 r0 top
U27 "LD1117S25TR" SOT-223 -3500,1550 r90 top
X1 "25MHz (with socket)" XTAL1 -1600,6000 r180 top
X2 "MC306-G-06Q-32.768 (manufacturer JFVNY)" SM8 -2700,3800 r180 top
X3 "25MHz (with socket)" XTAL_socket -2275,3800 r0 top
Z1 "SMAJ5.0A-TR" 1R1C -3475,2650 r270 top

## Footprints (in the part's own frame and the unit in brackets; to place one, negate y for a bottom-side part, rotate by r counter-clockwise, add the part's x,y. Pads: shape width x height; smd on the part's side, far side on the other; paste and mask are expansions set on the pad)
1R1C [mm]
  rect 2.3x1.75 smd: 1(1.9,0) 2(-1.9,0)
  silkscreen extent -2.2,-1.5 2.2,1.5
2*3P [mil]
  round 60 hole 40: 1(0,0) 2(100,0) 3(0,-100) 4(100,-100) 5(0,-200) 6(100,-200)
  silkscreen extent -50,-250 150,50
2*25P [mil]
  round 60 hole 40: 1(0,0) 2(100,0) 3(0,-100) 4(100,-100) 5(0,-200) 6(100,-200) 7(0,-300) 8(100,-300) 9(0,-400) 10(100,-400) 11(0,-500) 12(100,-500) 13(0,-600) 14(100,-600) 15(0,-700) 16(100,-700) 17(0,-800) 18(100,-800) 19(0,-900) 20(100,-900) 21(0,-1000) 22(100,-1000) 23(0,-1100) 24(100,-1100) 25(0,-1200) 26(100,-1200) 27(0,-1300) 28(100,-1300) 29(0,-1400) 30(100,-1400) 31(0,-1500) 32(100,-1500) 33(0,-1600) 34(100,-1600) 35(0,-1700) 36(100,-1700) 37(0,-1800) 38(100,-1800) 39(0,-1900) 40(100,-1900) 41(0,-2000) 42(100,-2000) 43(0,-2100) 44(100,-2100) 45(0,-2200) 46(100,-2200) 47(0,-2300) 48(100,-2300) 49(0,-2400) 50(100,-2400)
  silkscreen extent -50,-2450 150,50
0603C [mil]
  rect 30x30 smd: 1(27.5,0) 2(-27.5,0)
  silkscreen extent -50,-20 50,20
0603D [mil]
  rect 30x30 smd: 1(27.5,0) 2(-27.5,0)
  silkscreen extent -50,-25 55,25
0603L [mil]
  rect 30x30 smd: 1(0,0) 2(-55,0)
  silkscreen extent -78,-20 23,20
0603R [mil]
  rect 30x30 smd: 1(27.5,0) 2(-27.5,0)
  silkscreen extent -50,-20 50,20
1504D [mil]
  rect 50x40 smd: 1(65,0) 2(-65,0)
  silkscreen extent -99,-30 100,30
ADJRH [mil]
  round 118.11 hole 100: 0(-200,275) 0(200,275)
  round 80 hole 50: 1(-100,0) 2(0,0) 3(100,0)
  silkscreen extent -185,50 185,500
AM240*320AA [mil]
  round 125.98 hole 125.98 unplated: 0(0,0) 0(0,1417.72)
  round 60 hole 40: 1(3211.94,1863.72) 2(3311.94,1863.72) 3(3211.94,1763.72) 4(3311.94,1763.72) 5(3211.94,1663.72) 6(3311.94,1663.72) 7(3211.94,1563.72) 8(3311.94,1563.72) 9(3211.94,1463.72) 10(3311.94,1463.72) 11(3211.94,1363.72) 12(3311.94,1363.72) 13(3211.94,1263.72) 14(3311.94,1263.72) 15(3211.94,1163.72) 16(3311.94,1163.72) 17(3211.94,1063.72) 18(3311.94,1063.72) 19(3211.94,963.72) 20(3311.94,963.72) 21(3211.94,863.72) 22(3311.94,863.72) 23(3211.94,763.72) 24(3311.94,763.72) 25(3211.94,663.72) 26(3311.94,663.72) 27(3211.94,563.72) 28(3311.94,563.72) 29(3211.94,463.72) 30(3311.94,463.72) 31(3211.94,363.72) 32(3311.94,363.72) 33(3211.94,263.72) 34(3311.94,263.72)
  silkscreen extent -98,-157 3412,2034
AM240*320B [mil]
  round 125.98 hole 125.98 unplated: 0(0,0) 0(0,1417.72)
  round 60 hole 40: 1(2848.94,1462.72) 2(2948.94,1462.72) 3(2848.94,1362.72) 4(2948.94,1362.72) 5(2848.94,1262.72) 6(2948.94,1262.72) 7(2848.94,1162.72) 8(2948.94,1162.72) 9(2848.94,1062.72) 10(2948.94,1062.72) 11(2848.94,962.72) 12(2948.94,962.72) 13(2848.94,862.72) 14(2948.94,862.72) 15(2848.94,762.72) 16(2948.94,762.72) 17(2848.94,662.72) 18(2948.94,662.72) 19(2848.94,562.72) 20(2948.94,562.72) 21(2848.94,462.72) 22(2948.94,462.72) 23(2848.94,362.72) 24(2948.94,362.72) 25(2848.94,262.72) 26(2948.94,262.72) 27(2848.94,162.72) 28(2948.94,162.72) 29(2848.94,62.72) 30(2948.94,62.72)
  silkscreen extent -98,-158 3219,1573
BNX001 [mm]
  round 1.8 hole 1.4: 1(2.5,2.5) 2(-2.5,2.5) 3(2.5,-2.5) 4(0,0) 5(5,0) 6(-2.5,-2.5)
  silkscreen extent -5,-5 5.76,5
C160M [mil]
  rect 100x80 smd paste-19.68 mask-19.68: 1(85,0) 2(-85,0)
  silkscreen extent -83,-83 83,83
C310M [mil]
  rect 200x120 smd paste-23.62 mask-23.62: 1(125,0) 2(-125,0)
  silkscreen extent -163,-163 163,163
D2PAK/A [mm]
  rect 2.8x1 smd: 1(11.4,-2.54) 2(11.4,0)
  rect 8x10.2 smd: 2(0,0)
  rect 2.8x1.42 smd: 3(11.4,2.54)
  silkscreen extent -4.06,-5.08 6.35,5.08
DB9/M [mil]
  round 50 hole 50: 0(-538,55) 0(-523,55) 0(-508,55) 0(-493,55) 0(-478,55) 0(-463,55) 0(-448,55) 0(448,55) 0(463,55) 0(478,55) 0(493,55) 0(508,55) 0(523,55) 0(538,55)
  oval 170x80 hole 50: 0(-493,55) 0(493,55)
  rect 70x80 hole 38: 1(218,0)
  oval 70x80 hole 38: 2(109,0) 3(0,0) 4(-109,0) 5(-218,0) 6(164,110) 7(55,110) 8(-54,110) 9(-163,110)
  silkscreen extent -618,-100 618,410
DC10B [mil]
  round 45 hole 30: 1(244.09,-40) 1(244.09,-20) 1(244.09,20) 1(244.09,40) 2(82.05,-196.85) 2(102.05,-196.85) 2(142.05,-196.85) 2(162.05,-196.85) 3(0,-40) 3(0,-20) 3(0,20) 3(0,40)
  oval 80x180 hole 30: 1(244.09,0) 3(0,0)
  oval 180x80 hole 30: 2(122.05,-196.85)
  silkscreen extent -175,-170 290,180
FlipChip(11) [mm]
  round 0.25 smd: A2(-0.75,0) A3(-0.75,0.5) B1(-0.25,-0.5) B2(-0.25,0) B3(-0.25,0.5) C1(0.25,-0.5) C2(0.25,0) C3(0.25,0.5) D1(0.75,-0.5) D2(0.75,0) D3(0.75,0.5)
  TopLayer lines w0.127: 1.04,0.54 1.04,0.79 0.9,0.79 ; 1.04,-0.59 1.04,-0.79 0.9,-0.79 ; -0.9,0.79 -1.04,0.79 -1.04,0.54 ; -0.9,-0.79 -1.04,-0.79 -1.04,-0.59
  silkscreen extent -0.83,-0.65 -0.57,-0.4
FTSH-110-01-L-DV [mil]
  round 38 hole 38 unplated: 0(-200,0) 0(200,0)
  rect 29x110 smd: 1(-225,-80) 2(-225,80) 3(-175,-80) 4(-175,80) 5(-125,-80) 6(-125,80) 7(-75,-80) 8(-75,80) 9(-25,-80) 10(-25,80) 11(25,-80) 12(25,80) 13(75,-80) 14(75,80) 15(125,-80) 16(125,80) 17(175,-80) 18(175,80) 19(225,-80) 20(225,80)
  silkscreen extent -275,-100 275,100
IDC20S [mil]
  round 60 hole 40: 1(0,0) 2(100,0) 3(0,-100) 4(100,-100) 5(0,-200) 6(100,-200) 7(0,-300) 8(100,-300) 9(0,-400) 10(100,-400) 11(0,-500) 12(100,-500) 13(0,-600) 14(100,-600) 15(0,-700) 16(100,-700) 17(0,-800) 18(100,-800) 19(0,-900) 20(100,-900)
  silkscreen extent -125,-1100 250,200
IDC34S [mil]
  round 60 hole 40: 1(0,0) 2(100,0) 3(0,-100) 4(100,-100) 5(0,-200) 6(100,-200) 7(0,-300) 8(100,-300) 9(0,-400) 10(100,-400) 11(0,-500) 12(100,-500) 13(0,-600) 14(100,-600) 15(0,-700) 16(100,-700) 17(0,-800) 18(100,-800) 19(0,-900) 20(100,-900) 21(0,-1000) 22(100,-1000) 23(0,-1100) 24(100,-1100) 25(0,-1200) 26(100,-1200) 27(0,-1300) 28(100,-1300) 29(0,-1400) 30(100,-1400) 31(0,-1500) 32(100,-1500) 33(0,-1600) 34(100,-1600)
  silkscreen extent -125,-1800 250,200
IR_VISHAY3 [mm]
  rect 0.5x2 smd: 1(-3.325,0) 2(-2.375,0) 3(-1.425,0) 4(-0.475,0) 5(0.475,0) 6(1.425,0) 7(2.375,0) 8(3.325,0)
  silkscreen extent -4.33,-4.17 4.18,1.1
J0011D21B [mil]
  round 126 hole 126 unplated: 0(-450,0) 0(0,0)
  round 60 hole 40: 1(-50,-250) 2(-100,-350) 3(-150,-250) 4(-200,-350) 5(-250,-250) 6(-300,-350) 7(-350,-250) 8(-400,-350) 9(24,193) 10(-76,133) 11(-374,193) 12(-474,133)
  round 80 hole 63: 13(85,-120) 14(-535,-120)
  silkscreen extent -550,-425 100,425
JOY [mil]
  round 27.56 hole 27.56 unplated: 0(-74.8,0)
  round 39.37 hole 39.37 unplated: 0(74.8,0)
  rect 40x70 smd: 1(-55.12,-122.05) 2(0,-122.05) 3(55.12,-122.05) 4(55.12,122.05) 5(0,122.05) 6(-55.12,122.05) G(-140,0) G(145,0)
  silkscreen extent -141,-150 146,150
JP2_SMD [mil]
  oct 15x30 smd rot 45: 1(-18,-8) 2(18,7)
  oct 15.75x30 smd rot 135: 1(-18,8)
  rect 26x26 smd rot 45: 2(13,0)
  oct 15x30 smd rot 135: 2(18,-7)
KS1708 [mil]
  round 60 hole 40: 1(-149.61,0) 2(149.61,0)
  silkscreen extent -334,-335 335,335
LGA14(3*5) [mm]
  rect 0.5x0.8 smd: 1(-2,-0.975) 2(-1.2,-0.975) 3(-0.4,-0.975) 4(0.4,-0.975) 5(1.2,-0.975) 6(2,-0.975) 8(2,0.975) 9(1.2,0.975) 10(0.4,0.975) 11(-0.4,0.975) 12(-1.2,0.975) 13(-2,0.975)
  rect 0.8x0.5 smd: 7(1.975,0) 14(-1.975,0)
  silkscreen extent -2.67,-2.37 2.5,1.5
LI1220_1 [mm]
  round 1.1 hole 1.1 unplated: 0(-3.75,0)
  round 1.5 hole 1.5 unplated: 0(3.75,0.025)
  oct 4x2.5 smd: 1(8.255,0) 2(-8.128,0)
  silkscreen extent -7.57,-7.62 7.57,7.62
LQFP48 [mm]
  rect 0.2x1 smd: 1(-2.75,-4.25) 2(-2.25,-4.25) 3(-1.75,-4.25) 4(-1.25,-4.25) 5(-0.75,-4.25) 6(-0.25,-4.25) 7(0.25,-4.25) 8(0.75,-4.25) 9(1.25,-4.25) 10(1.75,-4.25) 11(2.25,-4.25) 12(2.75,-4.25) 25(2.75,4.25) 26(2.25,4.25) 27(1.75,4.25) 28(1.25,4.25) 29(0.75,4.25) 30(0.25,4.25) 31(-0.25,4.25) 32(-0.75,4.25) 33(-1.25,4.25) 34(-1.75,4.25) 35(-2.25,4.25) 36(-2.75,4.25)
  rect 1x0.2 smd: 13(4.25,-2.75) 14(4.25,-2.25) 15(4.25,-1.75) 16(4.25,-1.25) 17(4.25,-0.75) 18(4.25,-0.25) 19(4.25,0.25) 20(4.25,0.75) 21(4.25,1.25) 22(4.25,1.75) 23(4.25,2.25) 24(4.25,2.75) 37(-4.25,2.75) 38(-4.25,2.25) 39(-4.25,1.75) 40(-4.25,1.25) 41(-4.25,0.75) 42(-4.25,0.25) 43(-4.25,-0.25) 44(-4.25,-0.75) 45(-4.25,-1.25) 46(-4.25,-1.75) 47(-4.25,-2.25) 48(-4.25,-2.75)
  silkscreen extent -3.81,-3.81 3.81,3.81
MSD(PJS008) [mm]
  round 0.7 hole 0.7 unplated: 0(0,7.55) 0(0,0)
  rect 1.6x0.8 smd: 1(-5.8,1.475) 2(-5.8,2.575) 3(-5.8,3.675) 4(-5.8,4.775) 5(-5.8,5.875) 6(-5.8,6.975) 7(-5.8,8.075) 8(-5.8,9.175)
  rect 1.6x0.85 smd: 9(-5.8,10.325)
  rect 1.4x1.95 smd: 10(4.4,11.225)
  rect 3.5x1.6 smd: G1(-3.65,-3.4)
  rect 3.1x1.5 smd: G2(7.35,11.45)
  rect 3.5x1.4 smd: G3(7.35,-3.5)
  rect 3.1x1.2 smd: G4(-4.15,11.6)
  silkscreen extent -5.07,-3.81 9.28,11.43
PB10 [mil]
  rect 60x40 smd: 1(-177.17,-87.5) 2(-177.17,87.5) 3(177.17,87.5) 4(177.17,-87.5)
  silkscreen extent -125,-125 125,125
polyzen [mm]
  rect 0.8x2.21 smd: 1(0,0)
  rect 0.7x0.94 smd: 2(3.429,0.635) 3(3.429,-0.635)
  silkscreen extent -0.38,-2.03 3.68,2.03
QFN16(3X3) [mil]
  rect 47.24x47.24 smd: 0(0,0)
  rect 10x28 smd: 1(-29.53,-58.74) 2(-9.84,-58.74) 3(9.84,-58.74) 4(29.53,-58.74) 9(29.53,58.74) 10(9.84,58.74) 11(-9.84,58.74) 12(-29.53,58.74)
  rect 28x10 smd: 5(58.74,-29.53) 6(58.74,-9.84) 7(58.74,9.84) 8(58.74,29.53) 13(-58.74,29.53) 14(-58.74,9.84) 15(-58.74,-9.84) 16(-58.74,-29.53)
  silkscreen extent -68,-68 59,59
QFN40(6*6) [mm]
  rect 4x4 smd: 0(0,0)
  rect 0.6x0.2 smd: 1(-2.87,2.25) 2(-2.87,1.75) 3(-2.87,1.25) 4(-2.87,0.75) 5(-2.87,0.25) 6(-2.87,-0.25) 7(-2.87,-0.75) 8(-2.87,-1.25) 9(-2.87,-1.75) 10(-2.87,-2.25) 21(2.87,-2.25) 22(2.87,-1.75) 23(2.87,-1.25) 24(2.87,-0.75) 25(2.87,-0.25) 26(2.87,0.25) 27(2.87,0.75) 28(2.87,1.25) 29(2.87,1.75) 30(2.87,2.25)
  rect 0.2x0.6 smd: 11(-2.25,-2.87) 12(-1.75,-2.87) 13(-1.25,-2.87) 14(-0.75,-2.87) 15(-0.25,-2.87) 16(0.25,-2.87) 17(0.75,-2.87) 18(1.25,-2.87) 19(1.75,-2.87) 20(2.25,-2.87) 31(2.25,2.87) 32(1.75,2.87) 33(1.25,2.87) 34(0.75,2.87) 35(0.25,2.87) 36(-0.25,2.87) 37(-0.75,2.87) 38(-1.25,2.87) 39(-1.75,2.87) 40(-2.25,2.87)
  silkscreen extent -3,-3 3,3
RES-4B [mil]
  rect 15.75x35 smd: 1(-47.24,-33.5) 2(-47.24,33.5) 3(-15.75,-33.5) 4(-15.75,33.5) 5(15.75,-33.5) 6(15.75,33.5) 7(47.24,-33.5) 8(47.24,33.5)
  silkscreen extent -70,-28 70,28
SAM(C816) [mm]
  rect 1.5x1.3 smd: 1(-12.3,-8.255) 2(-12.3,-5.715) 3(-12.3,-3.175) 4(-12.3,-0.635) 5(12.3,-8.255) 6(12.3,-5.715) 7(12.3,-3.175) 8(12.3,-0.635)
  rect 1.75x1 smd: 17(-5.5,4.445) 18(-5.5,6.985)
  round 2.2 hole 2.2 unplated: G0(-10.16,22.225) G0(10.16,-22.225)
  silkscreen extent -17.15,-29.59 14.61,26.42
SIP2 [mil]
  round 60 hole 40: 1(0,0) 2(100,0)
  silkscreen extent -50,-50 150,50
SIP3 [mil]
  rect 60x60 hole 40: 1(0,0)
  round 60 hole 40: 2(100,0) 3(200,0)
  silkscreen extent -50,-50 250,50
SM8 [mm]
  rect 1.9x1.3 smd: 1(-2.75,-1.6) 2(2.75,-1.6) 3(2.75,1.6) 4(-2.75,1.6)
  silkscreen extent -4.44,-1.91 4.44,1.91
SO8 [mil]
  rect 20x60 smd: 1(-75,-112.5) 2(-25,-112.5) 3(25,-112.5) 4(75,-112.5) 5(75,112.5) 6(25,112.5) 7(-25,112.5) 8(-75,112.5)
  silkscreen extent -105,-52 105,48
SO28 [mil]
  rect 25x75 smd: 1(-325,-200) 2(-275,-200) 3(-225,-200) 4(-175,-200) 5(-125,-200) 6(-75,-200) 7(-25,-200) 8(25,-200) 9(75,-200) 10(125,-200) 11(175,-200) 12(225,-200) 13(275,-200) 14(325,-200) 15(325,200) 16(275,200) 17(225,200) 18(175,200) 19(125,200) 20(75,200) 21(25,200) 22(-25,200) 23(-75,200) 24(-125,200) 25(-175,200) 26(-225,200) 27(-275,200) 28(-325,200)
  silkscreen extent -360,-120 360,120
SOT323-5L [mil]
  rect 12x20 smd: 1(-25.59,-37.4) 2(0,-37.4) 3(25.59,-37.4) 4(25.59,37.4) 5(-25.59,37.4)
  silkscreen extent -40,-25 40,25
SOT-23 [mil]
  rect 36x36 smd: 1(40,37.5) 2(40,-37.5)
  rect 50x36 smd: 3(-40,0.5)
  silkscreen extent -45,-58 45,58
SOT-23-5L [mil]
  rect 30x16 smd: 1(-53.15,37.4) 2(-53.15,0) 3(-53.15,-37.4) 4(53.15,-37.4) 5(53.15,37.4)
  silkscreen extent -33,-58 32,57
SOT-23-6L [mil]
  rect 30x16 smd: 1(-53.15,37.4) 2(-53.15,0) 3(-53.15,-37.4) 4(53.15,-37.4) 5(53.15,0) 6(53.15,37.4)
  silkscreen extent -55,-58 32,70
SOT-223 [mil]
  rect 80x40 smd: 1(125,-93) 2(125,0) 3(125,93)
  rect 90x120 smd: 2(-125,0)
  silkscreen extent -48,-141 62,149
SSOP28 [mm]
  rect 0.95x0.3 smd: 1(-3.8,4.225) 2(-3.8,3.575) 3(-3.8,2.925) 4(-3.8,2.275) 5(-3.8,1.625) 6(-3.8,0.975) 7(-3.8,0.325) 8(-3.8,-0.325) 9(-3.8,-0.975) 10(-3.8,-1.625) 11(-3.8,-2.275) 12(-3.8,-2.925) 13(-3.8,-3.575) 14(-3.8,-4.225) 15(3.8,-4.225) 16(3.8,-3.575) 17(3.8,-2.925) 18(3.8,-2.275) 19(3.8,-1.625) 20(3.8,-0.975) 21(3.8,-0.325) 22(3.8,0.325) 23(3.8,0.975) 24(3.8,1.625) 25(3.8,2.275) 26(3.8,2.925) 27(3.8,3.575) 28(3.8,4.225)
  silkscreen extent -2.56,-4.55 2.56,4.55
ST-212-02V [mil]
  round 45 hole 45 unplated: 0(-393.7,-196.85) 0(-393.7,196.85) 0(-196.85,0) 0(0,196.85) 0(0,-196.85) 0(98.43,196.85) 0(98.43,-196.85)
  round 60 hole 40: 1(0,0) 2(-196.85,196.85) 3(-196.85,-196.85) 4(-393.7,98.43) 5(-393.7,0) 6(-393.7,-98.43)
  silkscreen extent -480,-248 268,248
TAN-A [mil]
  rect 50x60 smd: 1(55,0) 2(-55,0)
  silkscreen extent -95,-45 105,45
TP [mil]
  round 60 hole 40: 1(0,0)
  silkscreen extent -45,-45 45,45
TQ100_TOOL [mm]
  rect 2.5x1.5 smd rot 135: 0(-8.06,-8.06) 0(8.06,8.06)
  rect 2.5x1.5 smd rot 45: 0(-8.06,8.06) 0(8.06,-8.06)
  round 1.5 hole 1.5 unplated: 0(-5,0) 0(5,0)
  rect 0.2x1.5 smd: 1(-6,-7.725) 2(-5.5,-7.725) 3(-5,-7.725) 4(-4.5,-7.725) 5(-4,-7.725) 6(-3.5,-7.725) 7(-3,-7.725) 8(-2.5,-7.725) 9(-2,-7.725) 10(-1.5,-7.725) 11(-1,-7.725) 12(-0.5,-7.725) 13(0,-7.725) 14(0.5,-7.725) 15(1,-7.725) 16(1.5,-7.725) 17(2,-7.725) 18(2.5,-7.725) 19(3,-7.725) 20(3.5,-7.725) 21(4,-7.725) 22(4.5,-7.725) 23(5,-7.725) 24(5.5,-7.725) 25(6,-7.725) 51(6,7.725) 52(5.5,7.725) 53(5,7.725) 54(4.5,7.725) 55(4,7.725) 56(3.5,7.725) 57(3,7.725) 58(2.5,7.725) 59(2,7.725) 60(1.5,7.725) 61(1,7.725) 62(0.5,7.725) 63(0,7.725) 64(-0.5,7.725) 65(-1,7.725) 66(-1.5,7.725) 67(-2,7.725) 68(-2.5,7.725) 69(-3,7.725) 70(-3.5,7.725) 71(-4,7.725) 72(-4.5,7.725) 73(-5,7.725) 74(-5.5,7.725) 75(-6,7.725)
  rect 1.5x0.2 smd: 26(7.725,-6) 27(7.725,-5.5) 28(7.725,-5) 29(7.725,-4.5) 30(7.725,-4) 31(7.725,-3.5) 32(7.725,-3) 33(7.725,-2.5) 34(7.725,-2) 35(7.725,-1.5) 36(7.725,-1) 37(7.725,-0.5) 38(7.725,0) 39(7.725,0.5) 40(7.725,1) 41(7.725,1.5) 42(7.725,2) 43(7.725,2.5) 44(7.725,3) 45(7.725,3.5) 46(7.725,4) 47(7.725,4.5) 48(7.725,5) 49(7.725,5.5) 50(7.725,6) 76(-7.725,6) 77(-7.725,5.5) 78(-7.725,5) 79(-7.725,4.5) 80(-7.725,4) 81(-7.725,3.5) 82(-7.725,3) 83(-7.725,2.5) 84(-7.725,2) 85(-7.725,1.5) 86(-7.725,1) 87(-7.725,0.5) 88(-7.725,0) 89(-7.725,-0.5) 90(-7.725,-1) 91(-7.725,-1.5) 92(-7.725,-2) 93(-7.725,-2.5) 94(-7.725,-3) 95(-7.725,-3.5) 96(-7.725,-4) 97(-7.725,-4.5) 98(-7.725,-5) 99(-7.725,-5.5) 100(-7.725,-6)
TSSOP16 [mm]
  rect 0.3x1.15 smd: 1(-2.275,-3.2) 2(-1.625,-3.2) 3(-0.975,-3.2) 4(-0.325,-3.2) 5(0.325,-3.2) 6(0.975,-3.2) 7(1.625,-3.2) 8(2.275,-3.2) 9(2.275,3.2) 10(1.625,3.2) 11(0.975,3.2) 12(0.325,3.2) 13(-0.325,3.2) 14(-0.975,3.2) 15(-1.625,3.2) 16(-2.275,3.2)
  silkscreen extent -2.6,-2.26 2.6,2.22
USB-MICRO-AB [mm]
  rect 2x2.8 smd: 0(-3.2,0)
  round 1.4 hole 0.83: 0(-3.055,4.175) 0(-3.055,-4.175) 0(-2.7,4.175) 0(-2.7,-4.175) 0(-2.315,4.175) 0(-2.315,-4.175)
  rect 2.2x1.4 hole 0.83: 0(-2.7,4.175) 0(-2.7,-4.175)
  round 1.05 hole 0.65: 0(0.325,2.225) 0(0.325,-2.225)
  rect 1.35x0.4 smd: 1(0,-1.3) 2(0,-0.65) 3(0,0) 4(0,0.65) 5(0,1.3)
  round 0.9 hole 0.9 unplated: 6(-3.45,-2.225) 6(-3.45,2.225) 6(-3.175,2.225) 6(-3.175,-2.225) 6(-2.9,2.225) 6(-2.9,-2.225)
  silkscreen extent -4.9,-4.03 -0.3,4.03
VB334 [mm]
  round 2 hole 1.3: 1(-3.125,3.125) 2(3.125,3.125) 3(3.125,-3.125) 4(-3.125,-3.125)
  round 2.032 hole 1.27: 5(0,0)
  silkscreen extent -5.5,-5.5 5.5,5.5
XTAL1 [mil]
  round 50 hole 30: 1(0,0) 2(-200,0)
  silkscreen extent -315,-89 114,89
XTAL_5X7 [mil]
  rect 50x60 smd: 1(0,0) 2(0,-200) 3(170,-200) 4(170,0)
  silkscreen extent -10,-248 180,47
XTAL_socket [mil]
  round 80 hole 53: 1(100,0) 2(-100,0)
  silkscreen extent -215,-89 214,89

## Free pads (board coordinates)
  round 137.8 hole 137.8 unplated: 0(-4275,225) 0(-4275,6575) 0(-225,225) 0(-225,6575)
  round 30 smd: 0(-4025,325) 0(-2600,4350) 0(-1750,5000) 0(-800,6275)

## Via types
v1: diameter 16, hole 8, TopLayer to BottomLayer, tented both sides, 534 vias

## Nets (pads, with @x,y where several pads share a name; then routed paths per layer and width w, separated by ;. In a path a pad name is that pad's centre, name@x,y a point inside that pad or via, vN(x,y) a via of type N, cw(c..) or ccw(c..) an arc to the next point about the centre after c; other vN are vias at no path point)
+2V5: C39.2 C40.2 C41.2 C47.1 C51.1 R75.1 TP5.1 U13.13 U13.16 U13.34 U27.2 | length 4117.8
  TopLayer w12: TP5.1@-4175,1000 -4100,1000 -3780,1320 -3535,1320 -3500,1355 U27.2@-3500,1425 ; v1(-3850,2075) -3827.5,2097.5 R75.1@-3775,2097.5 ; v1(-3250,1480) C51.1@-3250,1550 ; C41.2@-3000,1652.5 -2979,1652.5 -2941.34,1690.16 U13.16@-2887.99,1690.16 ; C39.2@-2998.29,1749.21 U13.13@-2887.99,1749.21 ; U13.34@-2662.01,1670.47 -2619.53,1670.47 -2600,1690 v1(-2600,1725) -2575,1750 C40.2@-2552.5,1750 ; v1(-2525,1800) C47.1@-2525,1870
  TopLayer w30: U27.2@-3500,1425 U27.2@-3500,1675
  S1 w12: v1(-3500,1575) -3225,1575 -3200,1600 -2925,1600 -2725,1800 v1(-2525,1800) ; v1(-3250,1480) -3250,1575 ; v1(-2956.49,1675.01) -2903.55,1622.06 ; v1(-2930,1749.21) -2874.21,1749.21 -2825,1700 ; v1(-2600,1725) -2600,1800
  BottomLayer w12: v1(-3850,2075) -3925,2000 -3925,1650 -3875,1600 -3525,1600 v1(-3500,1575)
  other v1: -3500,1615